# Altium PCB PCB1.pcbdoc
Units mil, origin at the board's own origin, x right, y up, seen from the top; angles counter-clockwise.
Board outline 1181.1 x 787.4 mil, 2 copper layers (Top Layer, Bottom Layer); 19 components, 11 nets, 46 pads, 22 vias.
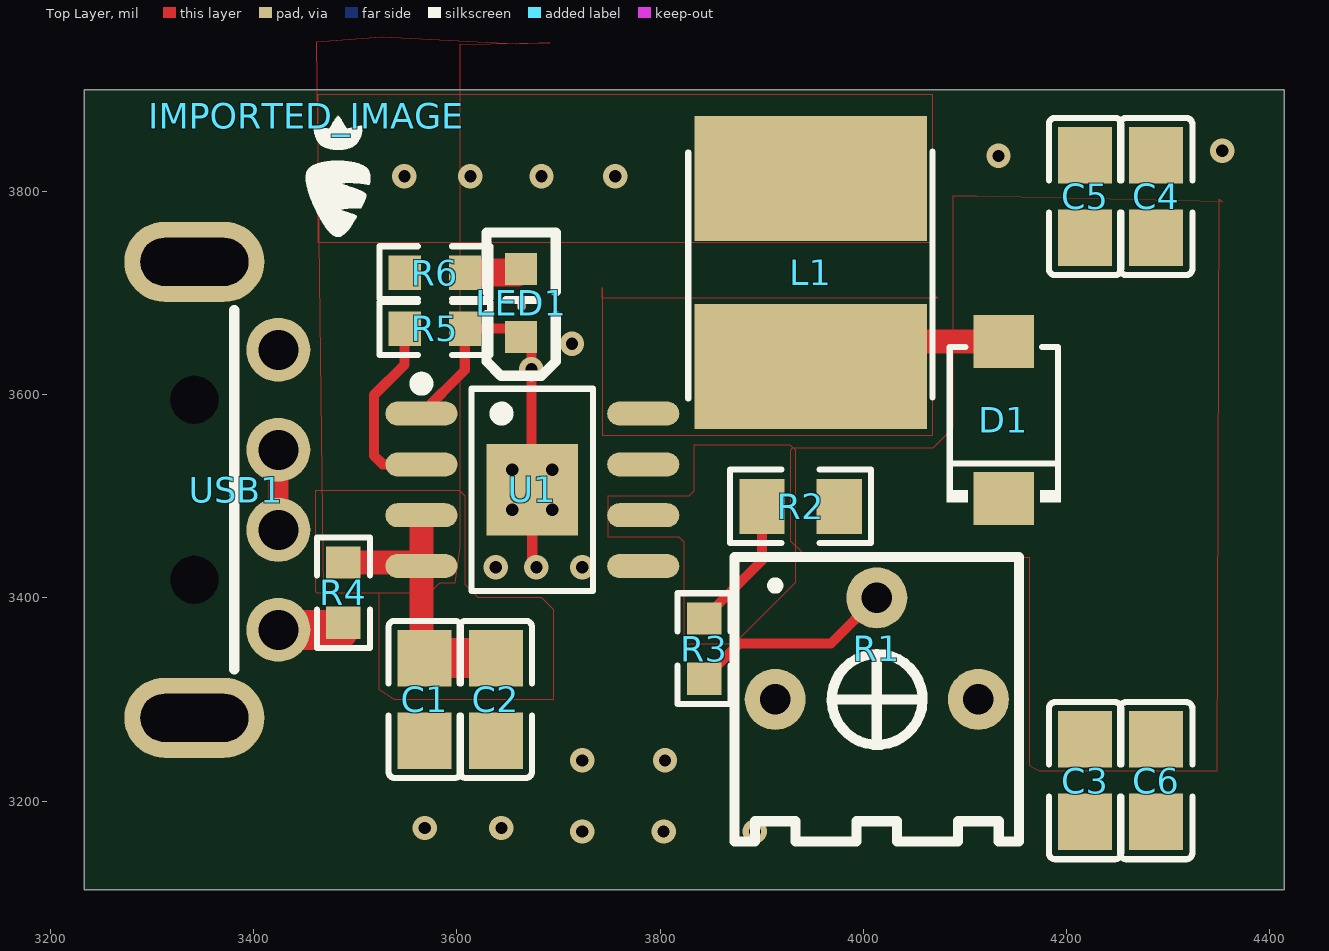
[diagram p0: Top Layer view]
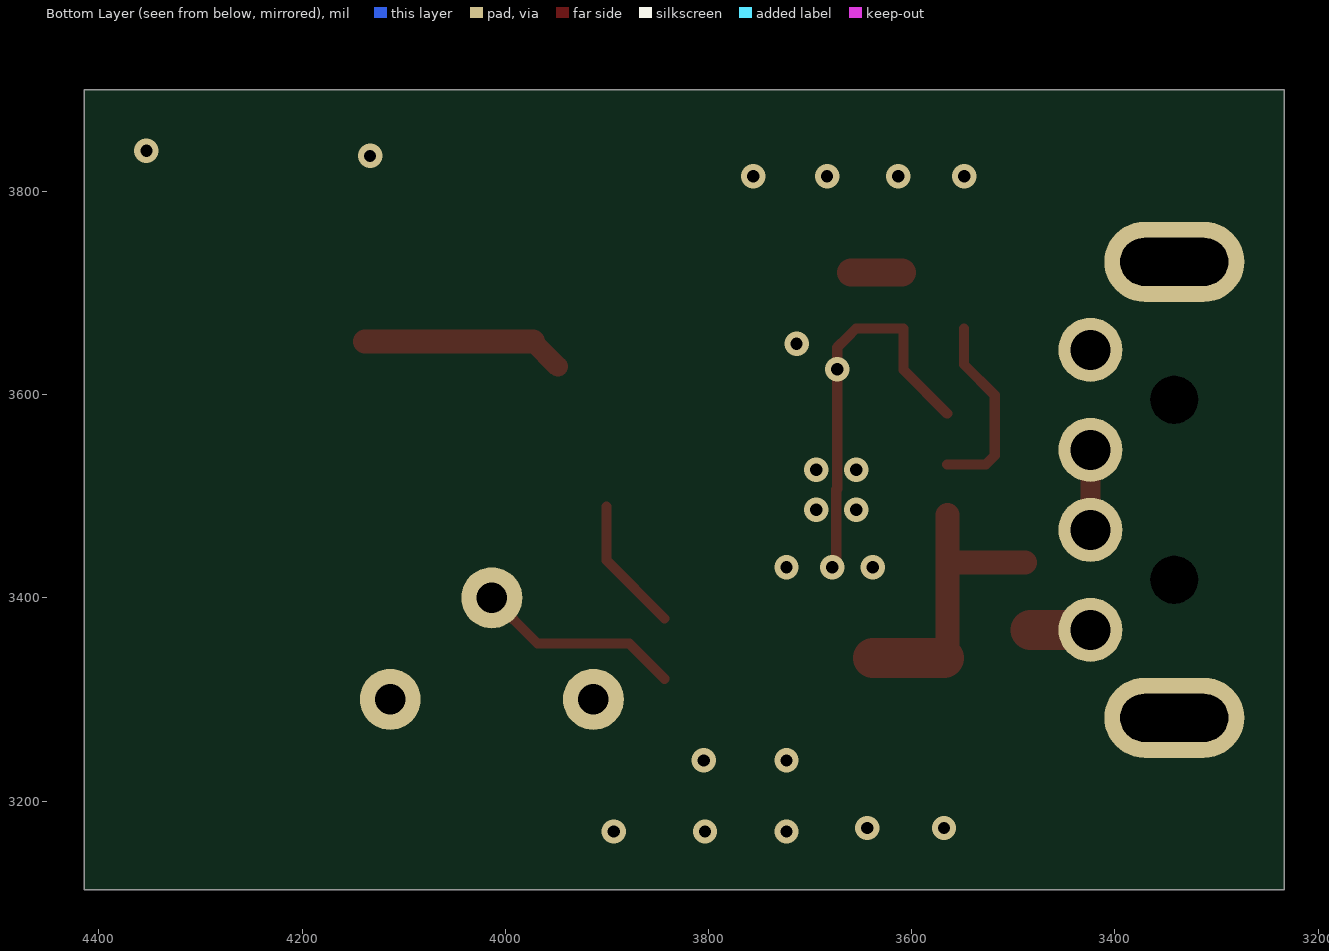
[diagram p1: Bottom Layer view, seen from below]

## Layer stack, top to bottom
Top Solder: solder mask 0.4, Solder Resist, Dk 3.5
Top Layer: signal copper 1.4
Dielectric 1: dielectric 12.6, FR-4, Dk 4.8
Bottom Layer: signal copper 1.4
Bottom Solder: solder mask 0.4, Solder Resist, Dk 3.5

## Board outline
3233.2,3112.6 4414.3,3112.6 4414.3,3900 3233.2,3900

## Components (designator, comment, footprint, x,y, rotation, side; value= is the part's Value field where it differs from the comment)
C1 "" C0805 3568.2,3300 r90 top
C2 "" C0805 3638.2,3300 r90 top
C3 "" C0805 4218.2,3220 r90 top
C4 "" C0805 4288.2,3795 r270 top
C5 "" C0805 4218.2,3795 r270 top
C6 "" C0805 4288.2,3220 r90 top
D1 "" SMAF_L3.5-W2.6-LS4.7-RD 4138.2,3575 r90 top
IMPORTED_IMAGE "IMPORTED_IMAGE" IMPORTED_IMAGE 3451.7,3874.29 r0 top
L1 "" IND-SMD_L5.8-W5.2 3948.2,3720 r90 top
LED1 "" LED0603-R-RD 3663.2,3690 r90 top
R1 "" RES-ADJ-TH_3362P 4013.2,3350 r0 top
R2 "" R0805 3938.2,3490 r0 top
R3 "" R0603 3843.2,3350 r90 top
R4 "" R0603 3488.2,3405 r90 top
R5 "" R0603 3578.2,3665 r180 top
R6 "" R0603 3578.2,3720 r0 top
U1 "" SOP-8_L4.9-W3.9-P1.27-LS6.0-BL-EP 3674.14,3506.3 r270 top
USB1 "" USB-A-TH_48037-0001_1 3382.81,3506.3 r270 top
? "" ? 0,0 r0 top

## Footprints (in the part's own frame and the unit in brackets; to place one, negate y for a bottom-side part, rotate by r counter-clockwise, add the part's x,y. Pads: shape width x height; smd on the part's side, far side on the other; paste and mask are expansions set on the pad)
C0805 [mil]
  rect 55.5x53.2 smd: 1(-40.6,0) 2(40.6,0)
  silkscreen extent -77,-36 77,36
IMPORTED_IMAGE [mil]
  silkscreen extent -1,-119 63,0
IND-SMD_L5.8-W5.2 [mil]
  rect 123x229.1 smd: 1(92.5,0) 2(-92.5,0)
  silkscreen extent -124,-120 119,121
LED0603-R-RD [mil]
  rect 31.5x31.5 smd: 1(33.5,0) 2(-33.5,0)
  silkscreen extent -72,-34 70,34
R0603 [mil]
  rect 31.8x34 smd: 1(-29.7,0) 2(29.7,0)
  silkscreen extent -54,-26 54,26
R0805 [mil]
  rect 44.6x54.2 smd: 1(-38,0) 2(38,0)
  silkscreen extent -69,-36 69,36
RES-ADJ-TH_3362P [mil]
  round 60 hole 30: 1(-100,-50) 2(0,50) 3(100,-50)
  silkscreen extent -140,-190 140,90
SMAF_L3.5-W2.6-LS4.7-RD [mil]
  rect 52.4x59.4 smd: 1(-77.2,0) 2(77.2,0)
  silkscreen extent -81,-56 72,56
SOP-8_L4.9-W3.9-P1.27-LS6.0-BL-EP [mil]
  oval 23.6x70.9 smd: 1(-75,-109.2) 2(-25,-109.2) 3(25,-109.2) 4(75,-109.2) 5(75,109.2) 6(25,109.2) 7(-25,109.2) 8(-75,109.2)
  rect 90.2x90.2 smd: 9(0,0)
  silkscreen extent -110,-115 100,60
USB-A-TH_48037-0001_1 [mil]
  round 63 hole 39.4: 1(137.8,41.3) 2(39.4,41.3) 3(-39.4,41.3) 4(-137.8,41.3)
  oval 78.7x137.8 hole 47.2 slot 106.3 at 90 deg: 5(-224.4,-41.3) 6(224.4,-41.3)
  Multi-Layer board cut-out: -88.6,-17.7 -98.84,-20.04 -107.05,-26.59 -111.61,-36.05 -111.61,-46.55 -107.05,-56.01 -98.84,-62.56 -88.6,-64.9 -88.6,-64.9 -78.36,-62.56 -70.15,-56.01 -65.59,-46.55 -65.59,-36.05 -70.15,-26.59 -78.36,-20.04 -88.6,-17.7
  Multi-Layer board cut-out: 88.6,-17.7 78.36,-20.04 70.15,-26.59 65.59,-36.05 65.59,-46.55 70.15,-56.01 78.36,-62.56 88.6,-64.9 88.6,-64.9 98.84,-62.56 107.05,-56.01 111.61,-46.55 111.61,-36.05 107.05,-26.59 98.84,-20.04 88.6,-17.7
  silkscreen extent -177,-2 177,-2
? [mil]

## Via types
v1: diameter 24.02, hole 12.01, Top Layer to Bottom Layer, 18 vias
v2: diameter 24, hole 12, Top Layer to Bottom Layer, 4 vias

## Nets (pads, with @x,y where several pads share a name; then routed paths per layer and width w, separated by ;. In a path a pad name is that pad's centre, name@x,y a point inside that pad or via, vN(x,y) a via of type N, cw(c..) or ccw(c..) an arc to the next point about the centre after c; other vN are vias at no path point)
5V: C1.2 C2.2 L1.1 R4.2 R6.1 U1.3 U1.4 | length 290.2
  Top Layer w10: U1.4@3561.54,3434.7 U1.4 ; C1.2@3564.94,3343.86 C1.2
  Top Layer w23.62: R4.2 U1.4@3561.54,3434.7 ; C1.2@3564.94,3343.86 U1.4 U1.3
  Top Layer w39.37: C1.2 C2.2
  other v1: 3548.2,3815 3613.2,3815 3683.2,3815 3755.81,3815
12V: C3.2 C4.2 C5.2 C6.2 D1.1 R2.2
$1N789: USB1.2 USB1.3 | length 78.8
  Top Layer w19.68: USB1.2 USB1.3
$1N832: R5.2 U1.2 | length 187.9
  Top Layer w10: R5.2 3548.5,3629.7 3518.2,3599.4 3518.2,3540 3526.9,3531.3 U1.2
$1N1375: D1.2 L1.2 U1.8 | length 200.2
  Top Layer w19.68: L1.2 L1.2@3972.9,3652.2
  Top Layer w23.62: L1.2@3972.9,3652.2 D1.2
$1N1632: R2.1 R3.2 U1.6 | length 133.9
  Top Layer w10: R3.2 3900.2,3436.7 R2.1
$1N1642: R1.2 R3.1 | length 203
  Top Layer w10: R3.1 3877.9,3355 3968.2,3355 R1.2
$1N4293: LED1.1 R6.2 | length 50
  Top Layer w27.56: R6.2@3609.7,3720 LED1.1@3659.7,3720
GND: C1.1 C2.1 C3.1 C4.1 C5.1 C6.1 LED1.2 R1.3 R5.1 U1.1 U1.5 U1.9 USB1.4 USB1.5 USB1.6 | length 393
  Top Layer w10: U1.1 3607.9,3624.25 R5.1 3654.7,3665 LED1.2 3673.2,3646.5 v1(3673.2,3625.01) 3673.2,3507.24 U1.9 3674.14,3434.06 v1(3678.2,3430)
  other v1: 3723.2,3170 3803.38,3170 3893.2,3170 3568.2,3173.42 3643.68,3173.42 3723.2,3240 3804.7,3240 3638.2,3430 3723.2,3430 3713.2,3650 4132.98,3834.9 4353.2,3840
VUSB: R4.1 USB1.1 | length 66.2
  Top Layer w10: R4.1@3483.2,3368.5 R4.1@3488.2,3373.5
  Top Layer w39.37: USB1.1 R4.1@3483.2,3368.5
"": R1.1 U1.7
  other v2: 3654.44,3486.6 3693.84,3486.6 3654.44,3526 3693.84,3526

## Polygon pours and split planes (outlines as drawn)
GND on Top Layer (solid, remove dead copper, pour order 6): 3158.2,3015 4638.2,3015 4638.2,3975 3158.2,3975
GND on Bottom Layer (solid, remove dead copper, pour order 7): 3123.2,3000 4678.2,3000 4678.2,4000 3123.2,4000
5V on Top Layer (solid, remove dead copper, pour order 0): 3463.2,3750 4068.2,3750 4068.2,3895 3463.2,3895
5V on Top Layer (solid, remove dead copper, pour order 1): 3460.63,3505.55 3460.63,3406.57 3462.2,3405 3523.2,3405 3523.2,3395 3523.2,3390 3523.2,3310 3538.2,3300 3695.04,3300 3695.04,3388.16 3683.2,3400 3621.04,3400 3614.24,3406.8 3608.2,3412.84 3608.2,3500 3602.65,3505.55
5V on Top Layer (solid, remove dead copper, pour order 2): 3658.2,3945 3526.31,3951.89 3461.31,3946.89 3468.2,3405 3538.2,3405 3558.2,3405 3573.2,3405 3583.2,3415 3598.2,3415 3603.2,3450 3603.2,3945 3691.31,3946.41
$1N1375 on Top Layer (solid, remove dead copper, pour order 3): 3743.2,3705 3743.2,3560 4068.2,3560 4068.2,3700 4073.2,3695 3743.2,3695
$1N1632 on Top Layer (solid, remove dead copper, pour order 4): 3753.2,3500 3748.2,3500 3748.2,3460 3818.2,3460 3823.2,3455 3823.2,3355 3872.79,3355 3933.2,3415.41 3933.2,3440 3933.2,3545 3928.2,3550 3833.2,3550 3833.2,3505 3828.2,3500 3753.2,3500
12V on Top Layer (solid, remove dead copper, pour order 5): 4088.2,3795 4088.2,3567 4068.2,3547 3930.2,3547 3928.2,3545 3928.2,3456.26 3938.2,3446.26 3944.46,3440 4163.2,3440 4163.2,3235 4173.2,3230 4340.28,3230 4348.2,3230 4350.28,3792.08 4353.2,3790 4111.52,3795 4091.52,3795